# Altium PCB Temp_sense_Project 2.0.PcbDoc (part 3 of 4)
Units mm, origin at the board's own origin, x right, y up, seen from the top; angles counter-clockwise.
Board outline 238.51 x 89.79 mm, 4 copper layers (Top Layer, Layer 1, Layer 2, Bottom Layer), stack 0.603 mm thick; 186 components, 160 nets, 969 pads, 267 vias.
Unrouted connection lines stored in the file: 10.
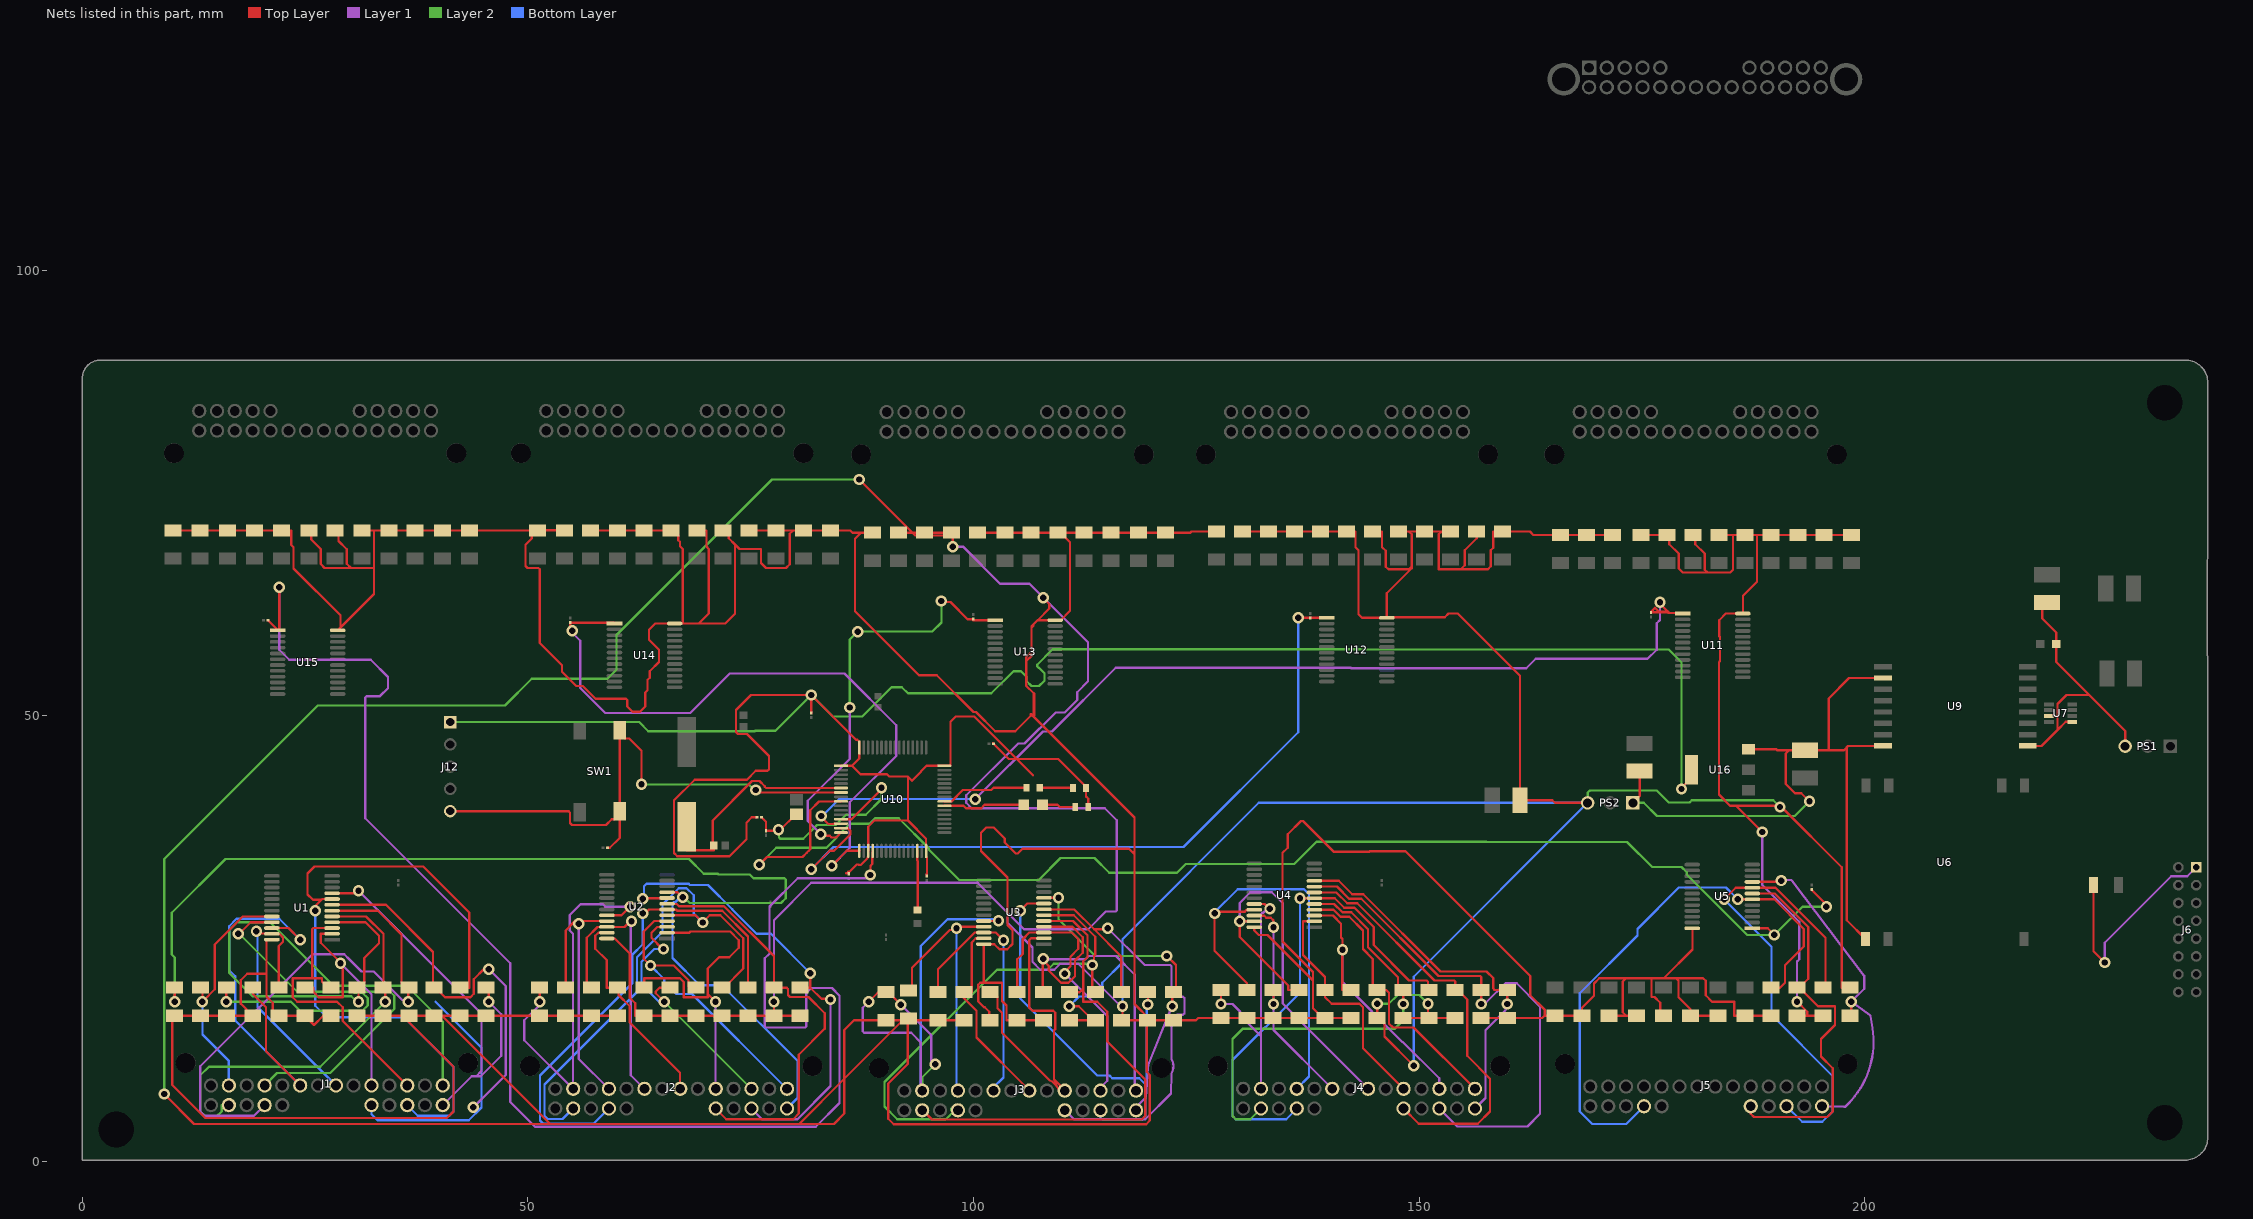
[diagram p4: the nets of this part, all layers, seen from the top]

## Via types
v1: diameter 1.27, hole 0.711, Top Layer to Bottom Layer, 261 vias
v2: diameter 0.711, hole 0.711, Top Layer to Bottom Layer, 6 vias

## Nets (pads, with @x,y where several pads share a name; then routed paths per layer and width w, separated by ;. In a path a pad name is that pad's centre, name@x,y a point inside that pad or via, vN(x,y) a via of type N, cw(c..) or ccw(c..) an arc to the next point about the centre after c; other vN are vias at no path point) (continued)
NetC7_1: C7.1 U5.1 U10.9 | length 153.9
  Top Layer w0.254: v1(75.946,33.274) 76.827,34.155 80.811,34.155 81.274,34.618 81.497,34.841 81.661,35.005 81.661,39.395 82.65,40.384 U10.9@85.126,40.384 ; U5.1@187.398,26.143 189.122,26.143 v1(189.865,25.4) ; C7.1@194.056,30.479 194.056,30.434 195.707,28.783 v1(195.707,28.575)
  Layer 2 w0.254: v1(75.946,33.274) 77.851,35.179 83.485,35.179 84.582,36.276 84.582,36.347 86.106,37.871 88.33,37.871 88.94,38.481 91.607,38.481 95.003,35.085 95.003,34.969 98.4,31.572 107.304,31.572 109.768,34.036 113.578,34.036 115.229,32.385 122.836,32.385 123.817,33.367 135.983,33.367 138.481,35.865 157.524,35.865 157.549,35.839 173.337,35.839 176.156,33.02 179.44,33.02 180.035,32.425 180.035,32.182 186.817,25.4 v1(189.865,25.4) 193.04,28.575 v1(195.707,28.575)
NetC8_1: C8.1 U10.14 U11.1 | length 116.9
  Top Layer w0.254: v1(82.911,38.745) 82.911,38.628 83.693,37.846 84.328,37.846 84.357,37.875 84.946,37.875 U10.14@84.963,37.892 ; v1(177.038,62.738) 177.038,62.56 177.944,61.654 176.924,61.654 176.475,62.103 176.018,61.645 176.018,61.6 C8.1@176.022,61.595 177.885,61.595 177.952,61.528 179.511,61.528 U11.1@179.578,61.461
  Layer 1 w0.254: v1(100.203,40.64) 107.796,48.233 108.809,48.233 115.947,55.372 142.327,55.372 142.378,55.321 162.012,55.321 163.079,56.388 175.641,56.388 176.657,57.404 176.657,60.365 177.038,60.746 v1(177.038,62.738)
  Bottom Layer w0.254: v1(82.911,38.745) 83.028,38.745 84.923,40.64 v1(100.203,40.64)
NetC9_1: C9.1 U10.15 U12.1 | length 84.7
  Top Layer w0.254: v1(81.788,32.766) 83.856,34.834 84.33,34.834 86.203,36.707 86.203,37.061 85.889,37.375 85.135,37.375 U10.15@85.126,37.384 ; v1(136.449,60.979) U12.1@139.627,60.979
  Bottom Layer w0.254: v1(81.788,32.766) 84.277,35.255 123.571,35.255 136.449,48.133 v1(136.449,60.979)
NetC10_1: C10.1 U10.16 U13.1 | length 47.4
  Top Layer w0.254: v1(82.864,36.713) 83.059,36.519 83.859,36.519 84.056,36.322 84.582,36.322 84.963,36.703 84.963,36.863 U10.16@84.967,36.867 ; v1(96.393,62.865) 96.512,62.746 97.409,62.746 99.323,60.832 99.945,60.832 99.945,60.787 99.949,60.782 99.949,60.725 U13.1@102.416,60.725
  Layer 1 w0.254: v1(82.864,36.713) 81.407,38.171 81.407,40.45 86.106,45.148 v1(86.106,50.927)
  Layer 2 w0.254: v1(86.106,50.927) 86.106,58.547 v1(86.995,59.436) 95.377,59.436 96.393,60.452 v1(96.393,62.865)
NetC11_1: C11.1 U10.17 U14.1 | length 76.2
  Top Layer w0.254: v1(54.977,59.526) 54.977,59.801 54.733,60.045 54.733,60.402 54.737,60.406 54.737,60.428 58.805,60.428 58.809,60.424 59.623,60.424 U14.1@59.703,60.344 ; v1(84.074,33.147) 85.761,34.834 U10.17@87.176,34.834
  Layer 1 w0.254: v1(54.977,59.526) 54.977,59.3 55.857,58.42 55.857,53.109 58.667,50.299 68.206,50.299 72.644,54.737 85.511,54.737 91.313,48.935 91.313,45.486 86.106,40.279 86.106,35.179 v1(84.074,33.147)
NetC12_1: C12.1 U10.20 U15.1 | length 176.6
  Top Layer w0.254: C12.1@20.829,60.706 21.844,59.691 21.844,59.636 U15.1@21.898,59.582 22.098,59.582 v1(22.098,64.414) ; v1(88.392,32.131) 88.445,32.184 88.445,33.147 88.646,33.348 88.646,34.019 88.668,34.04 88.668,34.654 U10.20@88.684,34.671
  Layer 1 w0.254: v1(22.098,64.414) 22.098,57.404 23.216,56.286 32.356,56.286 34.29,54.352 34.29,53.09 33.397,52.197 31.899,52.197 31.75,52.048 31.75,38.481 48.006,22.225 48.006,6.655 50.8,3.861 82.296,3.861 84.963,6.528 84.963,18.582 84.114,19.431 81.788,19.431 81.229,18.872 81.229,15.16 81.08,15.011 76.73,15.011 76.581,15.16 76.581,22.777 77.089,23.285 77.089,28.575 80.264,31.75 88.011,31.75 v1(88.392,32.131)
NetC13_2: C13.2 U10.6 Y1.1 | length 29.3
  Top Layer w0.254: Y1.1@67.818,37.541 Y1.1@67.818,35.826 ; C13.2@70.851,35.433 70.851,34.9 67.818,34.9 Y1.1@67.818,35.826 ; U10.6@85.126,41.884 76.73,41.884 76.581,42.033 76.581,42.077 75.986,42.672 75.144,42.672 70.724,38.252 70.724,35.052 70.575,34.903 68.741,34.903 Y1.1@67.818,35.826
NetC14_1: C14.1 J12.5 SW1.1 SW1.2 U10.7 | length 64.3
  Top Layer w0.254: J12.5@41.275,39.283 47.585,39.283 47.603,39.265 54.559,39.265 54.708,39.116 54.708,37.957 54.931,37.734 58.758,37.734 59.399,38.375 59.716,38.375 60.289,38.948 SW1.2@60.289,39.265 ; C14.1@58.928,35.179 58.978,35.179 59.182,35.179 60.289,36.286 SW1.2@60.289,39.265 ; SW1.1@60.289,48.365 SW1.1@60.289,48.015 ; v1(62.738,42.291) 62.738,46.08 61.376,47.442 60.862,47.442 SW1.1@60.289,48.015 ; v1(75.565,41.656) 75.84,41.656 76.12,41.376 U10.7@84.518,41.376 ; SW1.2@60.289,39.265 SW1.1@60.289,48.015
  Layer 2 w0.254: v1(62.738,42.291) 74.763,42.291 75.398,41.656 v1(75.565,41.656)
NetC15_2: C15.2 C16.1 FB1.2 U10.13 | length 27.6
  Top Layer w0.254: FB1.2@76.201,38.608 76.708,38.101 C16.1@76.708,37.084 77.978,37.084 v1(78.105,37.211) 78.322,37.211 80.062,38.951 C15.2@80.137,38.951 ; U10.13@85.126,38.384 86.307,38.384 89.662,41.739 v1(89.662,41.9)
  Layer 2 w0.254: v1(78.105,37.211) 78.167,37.149 78.167,36.344 78.315,36.195 80.899,36.195 82.433,37.729 84.527,37.729 85.685,38.887 87.909,38.887 89.662,40.64 v1(89.662,41.9)
NetC17_1: C17.1 U10.30 | length 6.7
  Top Layer w0.254: U10.30@93.676,34.834 93.676,33.757 93.726,33.707 C17.1@93.726,28.182
NetC18_1: C18.1 C21.1 C25.1 C26.1 FB1.1 J12.1 R122.1 R123.1 U10.1 U10.19 U10.32 U10.48 U10.64 U16.4 | length 296.2
  Top Layer w0.254: FB1.1@75.692,38.608 75.642,38.604 75.116,38.604 74.513,38 74.513,36.127 72.607,34.221 66.749,34.221 66.387,34.583 66.387,40.499 68.711,42.823 74.577,42.823 75.569,43.815 76.884,43.815 77.033,43.964 77.033,45.49 74.575,47.947 73.56,47.947 73.337,48.17 73.337,50.636 75.025,52.324 v1(81.788,52.324) ; C26.1@81.788,50.292 v1(81.788,52.324) ; U10.1@85.126,44.384 86.36,44.384 ; 85.725,32.308 85.775,32.308 85.979,32.512 86.106,32.512 86.89,33.296 87.1,33.296 87.141,33.255 87.351,33.255 88.103,34.007 88.103,34.123 88.155,34.175 88.155,34.813 U10.19@88.176,34.834 88.176,37.543 88.868,38.235 92.642,38.235 ; C21.1@94.742,32.131 94.742,32.177 94.746,32.181 94.746,32.265 94.768,32.287 94.768,34.079 94.676,34.172 U10.32@94.676,34.834 94.676,36.2 92.642,38.235 ; C25.1@102.176,46.922 103.962,45.136 104.851,45.136 ; 106.68,43.307 104.851,45.136 ; R122.1@112.866,39.751 112.866,40.691 112.612,40.945 R123.1@112.612,41.91 112.612,42.037 109.513,45.136 104.851,45.136 ; v1(179.451,41.783) 179.451,41.924 180.569,43.042 U16.4@180.569,43.942 ; v1(81.788,52.324) 86.817,47.295 86.953,47.295 87.176,47.072 U10.64@87.176,46.434 87.176,45.2 86.36,44.384 ; 86.36,44.384 87.32,43.424 90.293,43.424 90.537,43.18 92.623,43.18 92.642,43.161 ; 92.642,38.235 92.642,43.161 ; 92.642,43.161 93.091,42.712 94.094,43.715 94.094,43.762 94.716,44.384 U10.48@96.726,44.384 97.257,44.384 97.409,44.536 97.409,49.316 98.004,49.911 100.076,49.911 104.851,45.136
  Layer 2 w0.254: J12.1@41.275,49.283 62.486,49.283 63.502,48.267 75.445,48.267 75.489,48.311 77.775,48.311 v1(81.788,52.324) 84.201,49.911 87.503,49.911 90.798,53.206 91.955,53.206 92.654,52.507 101.997,52.507 104.481,54.991 105.323,54.991 105.918,54.396 105.918,53.935 106.513,53.34 107.355,53.34 107.95,53.935 107.95,54.777 107.355,55.372 107.29,55.372 107.141,55.521 107.141,55.731 108.864,57.455 143.434,57.455 143.455,57.434 178.024,57.434 179.451,56.007 v1(179.451,41.783)
NetC19_2: C19.2 C22.2 PS2.1 U6.9 U9.10 U9.16 U16.3 | length 83.2
  Top Layer w0.254: PS2.1@173.99,40.223 174.752,40.985 C19.2@174.752,43.789 ; U16.3@186.969,46.242 190.068,46.242 190.183,46.127 191.516,46.127 ; v1(193.802,40.386) 192.889,41.299 192.18,41.299 191.135,42.344 191.135,45.746 191.516,46.127 ; U6.9@200.088,24.943 197.993,27.038 197.993,46.482 198.12,46.609 198.17,46.609 ; U9.16@202.057,46.609 198.17,46.609 ; U9.10@202.057,54.229 198.247,54.229 195.957,51.939 195.957,46.127 ; 191.516,46.127 C22.2@193.294,46.127 195.957,46.127 ; 195.957,46.127 197.688,46.127 198.018,46.457 198.17,46.609
  Layer 2 w0.254: PS2.1@173.99,40.223 175.22,40.223 176.708,38.735 192.151,38.735 v1(193.802,40.386)
NetC20_1: C20.1 PS2.3 R1.1 R2.1 R3.1 R4.1 R5.1 R6.1 R7.1 R8.1 R9.1 R10.1 R11.1 R12.1 R13.1 R14.1 R15.1 R16.1 R17.1 R18.1 R19.1 R20.1 R21.1 R22.1 R23.1 R24.1 R25.1 R26.1 R27.1 R28.1 R29.1 R30.1 R31.1 R32.1 R33.1 R34.1 R35.1 R36.1 R37.1 R38.1 R39.1 R40.1 R41.1 R42.1 R43.1 R44.1 R45.1 R46.1 R47.1 R48.1 R49.1 R50.1 R51.1 R52.1 R53.1 R54.1 R55.1 R56.1 R57.1 R58.1 R59.1 R60.1 R61.1 R62.1 R63.1 R64.1 R65.1 R66.1 R67.1 R68.1 R69.1 R70.1 R71.1 R72.1 R73.1 R74.1 R75.1 R76.1 R77.1 R78.1 R79.1 R80.1 R81.1 R82.1 R83.1 R84.1 R85.1 R86.1 R87.1 R88.1 R89.1 R90.1 R91.1 R92.1 R93.1 R94.1 R95.1 R96.1 R97.1 R98.1 R99.1 R100.1 R101.1 R102.1 R103.1 R104.1 R105.1 R106.1 R107.1 R108.1 R109.1 R110.1 R111.1 R112.1 R113.1 R114.1 R115.1 R116.1 R117.1 R118.1 R119.1 R120.1 U1.24 U2.24 U3.24 U4.24 U5.24 U11.24 U12.24 U13.24 U14.24 U15.24 | length 1618.7
  Top Layer w0.254: v1(9.169,7.544) 12.522,4.191 52.502,4.191 ; R109.1@10.16,70.79 R110.1@13.208,70.79 R111.1@16.256,70.79 R112.1@19.304,70.79 R113.1@22.352,70.79 23.444,70.79 23.444,69.164 23.698,68.91 23.698,66.523 28.956,61.265 28.956,59.887 ; U1.24@21.263,24.873 20.65,24.873 20.65,21.04 ; R114.1@25.4,70.79 25.679,70.79 25.679,69.762 26.734,68.707 26.734,67.017 27.178,66.573 30.138,66.573 ; R7.1@27.876,16.332 27.014,16.332 25.984,15.302 R8.1@24.955,16.332 R9.1@22.034,16.332 21.361,16.332 21.361,17.78 20.65,18.491 20.65,21.04 ; R115.1@28.321,70.79 28.727,70.79 28.727,69.596 29.655,68.668 29.655,67.056 30.138,66.573 ; U15.24@28.648,59.582 28.651,59.582 28.956,59.887 ; R6.1@30.797,16.332 R5.1@33.718,16.332 R4.1@35.916,16.332 ; R116.1@31.369,70.79 32.715,70.79 ; R98.1@54.102,70.79 53.619,70.79 53.619,70.815 51.079,70.815 R97.1@51.054,70.79 R97.1@50.96,70.79 ; R99.1@57.023,70.79 R100.1@60.071,70.79 R101.1@62.992,70.79 R102.1@66.04,70.79 66.315,70.79 66.866,70.24 66.866,69.699 67.056,69.509 67.056,69.025 67.374,68.707 67.374,60.357 67.361,60.344 ; U2.24@58.855,25 59.734,25 61.417,23.317 61.417,18.339 62.027,17.729 62.027,16.332 R20.1@62.992,16.332 R19.1@65.913,16.332 R18.1@68.834,16.332 R17.1@71.755,16.332 R16.1@74.676,16.332 R15.1@77.597,16.332 ; R21.1@60.071,16.332 R22.1@57.15,16.332 R23.1@54.229,16.332 R24.1@51.308,16.332 R1.1@45.275,16.332 R2.1@42.354,16.332 R3.1@40.361,16.332 ; R103.1@68.961,70.79 70.028,70.79 70.028,68.974 70.295,68.707 70.295,61.468 69.171,60.344 ; R104.1@71.882,70.79 72.542,70.79 72.542,69.901 73.228,69.215 ; R105.1@74.803,70.79 R106.1@77.851,70.79 79.756,70.79 ; v1(77.597,17.907) R15.1@77.597,16.332 ; R14.1@80.518,16.332 R15.1@77.597,16.332 ; v1(87.173,76.505) 93.141,70.536 ; R85.1@88.646,70.536 87.376,70.536 ; R86.1@91.567,70.536 93.141,70.536 ; R87.1@94.615,70.536 95.961,70.536 ; R87.1@94.615,70.536 R87.1@94.488,70.536 93.141,70.536 ; 95.961,70.536 R88.1@97.028,70.536 ; v1(97.663,68.952) 97.663,70.409 R88.1@97.536,70.536 R88.1@97.028,70.536 ; R33.1@98.933,15.824 R34.1@96.012,15.824 93.091,15.824 93.091,16.002 R35.1@92.723,16.002 92.24,16.002 R35.1@92.062,15.824 ; R89.1@100.457,70.536 R90.1@103.505,70.536 R91.1@106.426,70.536 R92.1@109.474,70.536 R92.1@109.749,70.536 ; U3.24@101.143,24.362 101.143,20.033 ; U3.24@101.146,24.365 102.337,24.365 102.902,23.8 103.784,23.8 104.369,24.384 104.369,25.959 103.81,26.518 103.81,31.846 100.838,34.818 100.838,36.87 101.433,37.465 102.275,37.465 103.509,36.231 103.509,35.778 104.742,34.544 104.953,34.544 105.486,35.077 117.45,35.077 118.059,34.468 ; R32.1@101.854,15.824 101.758,15.92 101.758,16.772 101.258,17.272 101.18,17.272 100.52,17.933 100.52,19.81 100.743,20.033 101.143,20.033 ; R30.1@107.823,15.824 R31.1@104.902,15.824 103.696,15.824 103.696,17.484 103.188,17.992 103.188,20.015 103.181,20.033 101.143,20.033 ; v1(107.823,63.246) 107.823,63.181 108.509,62.495 108.509,62.027 107.207,60.725 ; R29.1@110.744,15.824 R28.1@113.39,15.824 ; v1(110.744,17.408) 111.805,17.408 R28.1@113.39,15.824 ; R28.1@113.665,15.824 R28.1@113.39,15.824 ; R27.1@116.586,15.824 R27.1@116.713,15.824 ; v1(116.713,17.399) R27.1@116.713,15.824 ; R73.1@127.254,70.663 124.46,70.663 124.333,70.536 R96.1@121.539,70.536 R95.1@118.491,70.536 R94.1@115.443,70.536 R93.1@112.395,70.536 R92.1@109.749,70.536 ; R74.1@130.175,70.663 R75.1@133.096,70.663 R76.1@136.017,70.663 R77.1@138.938,70.663 R78.1@141.859,70.663 142.875,70.663 142.875,68.898 143.193,68.58 143.193,61.372 143.586,60.979 U12.24@146.355,60.979 ; U4.24@131.499,26.27 131.499,25.908 132.007,25.4 132.994,25.4 138.1,20.295 ; R43.1@142.367,16.078 R44.1@139.446,16.078 R44.1@139.192,16.078 ; R79.1@144.78,70.663 145.847,70.663 145.847,68.91 146.253,68.504 146.253,66.726 146.558,66.421 148.844,66.421 149.174,66.751 ; v1(145.288,17.662) R42.1@145.288,16.078 145.563,16.078 146.114,15.527 146.114,14.007 v1(149.403,10.719) ; R80.1@147.701,70.663 148.869,70.663 ; R41.1@148.209,16.078 R40.1@151.13,16.078 R40.1@151.554,16.078 ; v1(151.003,17.662) 151.003,16.628 R40.1@151.554,16.078 ; R82.1@153.543,70.663 152.502,70.663 ; R39.1@154.051,16.078 R40.1@151.554,16.078 ; R83.1@156.464,70.663 156.464,69.905 155.13,68.571 155.13,66.89 154.686,66.446 ; R38.1@156.972,16.078 R37.1@159.893,16.078 163.831,16.078 164.085,16.332 ; PS2.3@168.91,40.223 165.238,40.223 164.948,40.513 C20.1@161.316,40.513 161.316,54.497 154.345,61.468 153.291,61.468 152.884,61.062 146.99,61.062 146.99,60.979 U12.24@146.377,60.979 U12.24@146.355,60.979 ; R58.1@171.323,16.332 173.228,16.332 ; R63.1@171.704,70.282 R62.1@168.783,70.282 R61.1@165.862,70.282 162.814,70.282 162.433,70.663 R84.1@159.385,70.663 158.318,70.663 158.318,68.847 158.051,68.58 158.051,66.763 157.734,66.446 154.686,66.446 ; R57.1@174.371,16.332 173.228,16.332 ; R64.1@174.879,70.282 R65.1@177.8,70.282 178.079,70.282 178.079,69.254 179.134,68.199 179.134,66.509 179.578,66.065 182.372,66.065 ; R56.1@177.419,16.332 177.063,16.332 177.063,17.78 176.42,18.424 176.085,18.424 176.085,20.549 ; U5.24@180.648,26.143 180.67,26.143 180.67,23.774 177.444,20.549 ; R66.1@180.721,70.282 181,70.282 181,69.245 182.055,68.19 182.055,66.382 182.372,66.065 ; R54.1@183.515,16.332 R55.1@180.467,16.332 180.467,17.069 179.121,18.415 179.121,20.244 178.816,20.549 ; R67.1@183.642,70.282 185.217,70.282 ; v1(188.519,36.957) 185.598,39.878 ; R52.1@189.484,16.332 R53.1@186.563,16.332 185.369,16.332 185.369,17.907 182.88,17.907 182.169,18.618 182.169,20.244 181.864,20.549 178.816,20.549 ; v1@190.355,39.878 185.598,39.878 ; v1@190.456,39.795 190.355,39.896 185.58,39.896 ; v1(190.5,39.751) 190.667,39.751 197.434,32.984 197.434,19.482 R49.1@198.374,19.482 ; R51.1@192.405,16.332 193.549,16.332 ; v1(192.405,17.916) 193.549,16.772 193.549,16.332 ; R50.1@195.326,16.332 193.549,16.332 ; R72.1@198.501,70.282 R71.1@195.453,70.282 R70.1@192.532,70.282 R69.1@189.484,70.282 187.909,70.282 ; 20.65,21.04 18.501,21.04 17.779,20.318 17.779,19.049 17.755,19.025 17.755,17.69 R10.1@19.113,16.332 R11.1@16.192,16.332 R12.1@13.271,16.332 R13.1@10.35,16.332 10.084,16.332 10.084,8.56 13.792,4.851 40.894,4.851 41.631,5.588 41.631,10.617 R4.1@35.916,16.332 ; 28.956,59.887 32.715,63.646 32.715,66.573 ; 30.138,66.573 32.715,66.573 ; 32.715,66.573 32.715,70.79 ; 32.715,70.79 R117.1@34.417,70.79 R118.1@37.338,70.79 R119.1@40.386,70.79 R120.1@43.434,70.79 R97.1@50.96,70.79 ; R4.1@35.916,16.332 R4.1@36.639,16.332 R3.1@39.433,16.332 R3.1@40.361,16.332 ; R3.1@40.361,16.332 52.502,4.191 ; R97.1@50.96,70.79 50.41,70.24 50.41,69.881 49.72,69.191 49.72,66.804 49.943,66.581 51.159,66.581 51.308,66.432 51.308,58.166 53.825,55.649 53.825,54.928 55.417,53.336 56.138,53.336 57.582,51.892 60.989,51.892 61.138,51.744 61.138,51.04 61.733,50.444 62.575,50.444 63.17,51.04 63.17,52.6 63.424,52.854 63.424,54.026 63.652,54.254 63.652,54.991 64.694,56.032 64.694,57.404 63.576,58.522 63.576,59.632 64.288,60.344 U14.24@66.454,60.344 67.361,60.344 ; 52.502,4.191 80.429,4.191 ; 67.361,60.344 69.171,60.344 ; 69.171,60.344 72.136,60.344 73.228,61.436 73.228,69.215 ; 73.228,69.215 73.745,68.698 76.137,68.698 76.137,67.144 76.708,66.573 78.954,66.573 79.375,66.994 79.375,70.409 79.756,70.79 ; 79.756,70.79 R107.1@80.899,70.79 R108.1@83.947,70.79 86.157,70.79 86.411,70.536 87.376,70.536 ; 80.429,4.191 85.496,9.258 ; 80.429,4.191 84.328,4.191 85.496,5.359 85.496,9.258 ; 85.496,9.258 R35.1@92.062,15.824 ; 85.496,9.258 85.496,14.732 86.588,15.824 R36.1@90.17,15.824 R35.1@92.062,15.824 ; 87.376,70.536 86.69,69.851 86.69,61.733 93.885,54.539 95.875,54.539 99.995,50.419 100.286,50.419 102.445,48.26 104.688,48.26 106.426,49.998 106.426,50.165 106.453,50.192 118.059,38.585 118.059,34.468 ; R35.1@92.062,15.824 92.608,15.824 92.608,10.922 90.424,8.738 90.424,4.775 91.034,4.166 119.38,4.166 119.786,4.572 119.786,9.692 119.431,10.047 R26.1@119.431,15.824 ; 93.141,70.536 93.459,70.218 96.71,70.218 R88.1@97.028,70.536 ; 105.918,53.347 105.918,56.109 ; 105.918,53.347 105.918,53.34 106.753,52.505 ; 105.918,53.347 106.753,52.512 106.753,52.505 ; 105.918,56.109 105.918,56.564 106.502,57.148 ; 105.918,56.109 106.502,56.693 106.502,57.148 ; 106.502,57.148 106.502,59.857 ; 106.502,59.857 106.705,60.06 106.705,60.223 ; 106.502,59.857 106.502,60.02 106.705,60.223 ; 106.705,60.223 107.207,60.725 ; 106.705,60.223 106.705,60.242 107.188,60.725 107.207,60.725 ; 106.753,52.505 106.753,50.109 106.807,50.055 106.807,52.451 106.753,52.505 ; 107.207,60.725 U13.24@109.166,60.725 109.779,60.725 110.82,61.766 110.82,69.466 R92.1@109.749,70.536 ; R27.1@116.713,15.824 R26.1@119.431,15.824 ; 118.059,34.468 118.059,17.652 R26.1@119.888,15.824 ; R26.1@119.431,15.824 R26.1@119.507,15.824 R26.1@119.888,15.824 ; R26.1@119.888,15.824 R25.1@122.428,15.824 124.968,15.824 125.222,16.078 R48.1@127.762,16.078 R47.1@130.683,16.078 R46.1@133.604,16.078 R45.1@136.525,16.078 R44.1@139.192,16.078 ; 138.1,20.295 138.1,21.234 134.671,24.663 134.671,34.609 135.255,35.194 135.255,36.692 136.751,38.188 136.962,38.188 140.403,34.747 144.407,34.747 144.458,34.798 148.463,34.798 162.484,20.777 162.484,18.618 164.085,17.017 164.085,16.332 ; 138.1,20.295 138.1,17.17 R44.1@139.192,16.078 ; U12.24@146.355,60.979 146.355,63.729 149.174,66.548 149.174,66.751 ; 148.869,70.663 R81.1@150.622,70.663 152.502,70.663 ; 148.869,70.663 149.174,70.358 149.174,66.751 ; 152.502,70.663 152.197,70.358 152.197,66.446 154.686,66.446 ; 164.085,16.332 R60.1@165.227,16.332 R59.1@168.275,16.332 168.275,17.221 169.621,18.567 169.621,19.95 170.212,20.541 171.716,20.541 171.724,20.549 173.228,20.549 ; 173.228,16.332 172.847,16.713 172.847,20.168 173.228,20.549 ; 173.228,20.549 176.085,20.549 ; 176.085,20.549 177.444,20.549 ; 177.444,20.549 178.816,20.549 ; 182.372,66.065 184.912,66.065 185.217,66.37 185.217,70.282 ; 185.217,70.282 R68.1@186.563,70.282 187.909,70.282 ; 185.58,39.896 184.894,39.896 183.642,41.148 183.642,56.007 183.769,56.134 183.769,58.826 183.667,58.928 183.667,60.724 184.404,61.461 U11.24@186.328,61.461 186.334,61.461 186.334,63.449 187.909,65.024 187.909,70.282 ; 185.58,39.896 185.598,39.878
  Layer 1 w0.254: v1(77.597,17.907) 77.597,27.051 81.788,31.242 100.457,31.242 103.81,27.889 ; v1(97.663,68.952) 98.815,68.952 ; v1(107.823,63.246) 106.274,64.795 102.972,64.795 98.815,68.952 ; v1(116.713,17.399) 116.521,17.399 111.746,22.174 109.739,22.174 109.068,21.504 107.496,21.504 106.604,22.396 106.604,23.978 103.81,26.772 103.81,27.889 ; v1(188.519,36.957) 188.519,31.013 192.659,26.873 192.659,22.659 192.405,22.405 v1(192.405,17.916) ; 98.815,68.952 98.866,68.952 102.998,64.821 106.274,64.821 112.852,58.243 112.852,53.857 111.628,52.633 111.628,51.771 110.228,50.371 109.216,50.371 105.73,46.885 105.012,46.885 99.187,41.061 99.187,40.219 99.782,39.624 114.721,39.624 116.067,38.278 116.067,28.165 115.918,28.016 114.844,28.016 112.863,26.035 105.664,26.035 103.81,27.889
  Layer 2 w0.254: v1(9.169,7.544) 9.169,33.909 26.416,51.156 47.422,51.156 50.419,54.153 58.928,54.153 59.944,55.169 59.944,59.055 77.394,76.505 v1(87.173,76.505) ; v1(145.288,17.662) 146.597,17.662 147.596,18.66 150.005,18.66 v1(151.003,17.662) ; PS2.3@168.91,40.223 168.91,41.351 169.164,41.605 176.657,41.605 178.003,40.259 180.336,40.259 180.59,40.513 189.738,40.513 v1(190.5,39.751)
  Bottom Layer w0.254: v1(110.744,17.408) 111.837,18.501 113.552,18.501 114.451,19.4 114.451,20.039 116.713,22.301 ; v1(116.713,17.399) 116.713,22.301 ; v1(149.403,10.719) 149.403,20.716 PS2.3@168.91,40.223 132.019,40.223 116.713,24.917 116.713,22.301
NetC24_1: C24.1 PS1.3 R124.2 U7.3 U7.5 U9.1 | length 36
  Top Layer w0.254: U9.1@218.307,46.609 219.821,46.609 219.847,46.609 221.627,48.389 221.627,49.967 ; C24.1@220.319,62.712 C24.1@220.472,62.712 ; C24.1@220.319,62.738 220.319,62.23 219.938,62.23 219.938,60.896 221.499,59.334 R124.2@221.499,58.039 221.499,56.021 225.196,52.324 ; U7.3@220.696,49.967 221.627,49.967 ; U7.5@223.296,49.317 222.555,49.317 221.645,48.407 221.645,49.967 221.627,49.967 ; PS1.3@229.235,46.573 229.235,48.285 225.196,52.324 ; 221.627,49.967 221.64,51.308 222.656,52.324 225.196,52.324
NetD1_1: D1.1 U10.39 | length 9.2
  Top Layer w0.254: U10.39@96.726,39.884 98.881,39.884 99.141,39.624 100.857,39.624 101.238,40.005 D1.1@105.63,40.005
NetD1_2: D1.2 R122.2 | length 3.8
  Top Layer w0.254: D1.2@107.73,40.005 109.423,40.005 109.677,39.751 R122.2@111.416,39.751
NetD2_1: D2.1 U10.40 | length 9.8
  Top Layer w0.254: U10.40@96.726,40.384 97.528,40.384 98.8,41.656 101.981,41.656 102.235,41.91 D2.1@105.93,41.91
NetD2_2: D2.2 R123.2 | length 3.7
  Top Layer w0.254: D2.2@107.43,41.91 R123.2@111.162,41.91
NetF1_1: F1.1 J6.1 | length 25.2
  Top Layer w0.254: F1.1@225.676,30.988 225.676,23.576 v1(226.949,22.303)
  Layer 1 w0.254: v1(226.949,22.303) 226.949,24.511 234.417,31.979 236.196,31.979 J6.1@237.204,32.987
NetJ1_1: J1.1 R1.2 U1.9 | length 47.1
  Top Layer w0.254: U1.9@28.013,30.073 30.433,30.073 30.713,30.353 v1(30.988,30.353) ; R1.2@45.275,19.482 45.593,19.164 v1(45.593,17.907)
  Layer 1 w0.254: v1(30.988,30.353) 44.78,16.561 44.78,10.135 44.196,9.55 ; J1.1@40.437,6.299 43.688,9.55 44.196,9.55 ; v1(45.593,17.907) 46.99,16.51 46.99,11.836 44.704,9.55 44.196,9.55
NetJ1_3: J1.3 R2.2 U1.8 | length 76.9
  Top Layer w0.254: v1(26.137,28.118) 26.137,28.636 26.838,29.337 ; U1.8@28.013,29.423 26.924,29.423 26.838,29.337 ; R2.2@42.354,19.482 43.409,19.482 43.409,27.915 38.252,33.071 26.035,33.071 25.268,32.304 25.268,29.932 25.863,29.337 26.838,29.337
  Bottom Layer w0.254: v1(26.137,28.118) 26.137,17.45 27.432,16.154 36.068,16.154 41.631,10.592 41.631,5.588 41.161,5.118 37.63,5.118 J1.3@36.449,6.299
NetJ1_5: J1.5 R3.2 U1.7 | length 74
  Top Layer w0.254: U1.7@28.013,28.773 34.052,28.773 39.345,23.481 R3.2@39.345,19.762 ; R3.2@39.433,19.482 39.345,19.482 R3.2@39.345,19.762 ; v1(45.593,21.565) 45.06,21.565 43.917,20.422 43.917,18.796 43.536,18.415 40.691,18.415 R3.2@39.345,19.762
  Layer 1 w0.254: v1(43.866,6.045) 47.498,9.677 47.498,19.66 v1(45.593,21.565)
  Bottom Layer w0.254: J1.5@32.436,6.299 32.436,5.283 33.109,4.61 43.345,4.61 44.78,6.045 44.78,6.96 ; 39.624,17.898 44.78,12.742 44.78,6.96 ; v1(43.866,6.045) 44.78,6.96
NetJ1_7: J1.7 R4.2 U1.6 | length 60.8
  Top Layer w0.254: U1.6@28.013,28.123 33.142,28.123 35.813,25.452 35.813,20.033 36.363,19.482 R4.2@36.639,19.482 36.576,19.42 v1(36.576,17.898)
  Layer 1 w0.254: J1.7@20.447,6.299 19.253,5.105 13.716,5.105 13.233,5.588 13.233,10.668 25.806,23.241 29.377,23.241 29.972,22.646 29.972,22.63 31.317,21.284 32.691,21.284 35.882,18.093 36.382,18.093 v1(36.576,17.898)
NetJ1_9: J1.9 R5.2 U1.5 | length 47.2
  Top Layer w0.254: U1.5@28.013,27.473 31.832,27.473 33.782,25.523 33.782,19.547 R5.2@33.718,19.482 33.985,19.482 v1(33.985,17.907)
  Layer 2 w0.254: J1.9@16.434,6.299 15.621,6.299 15.621,5.588 14.986,4.953 13.868,4.953 13.233,5.588 13.233,9.652 14.199,10.617 26.695,10.617 v1(33.985,17.907)
NetJ1_11: J1.11 R6.2 U1.4 | length 71.3
  Top Layer w0.254: U1.4@28.013,26.823 31.764,26.823 33.274,25.313 33.274,24.471 31.623,22.82 31.623,20.033 31.072,19.482 R6.2@30.797,19.482 30.988,19.291 v1(30.988,17.898)
  Layer 2 w0.254: v1(30.988,17.898) 30.788,17.898 30.17,18.517 19.094,18.517 16.475,21.135 16.475,25.948 17.35,26.823 21.042,26.823 28.18,19.685 36.4,19.685 40.437,15.649 J1.11@40.437,8.509
NetJ1_13: J1.13 R7.2 U1.3 | length 32.7
  Top Layer w0.254: R7.2@27.876,19.482 27.534,19.482 26.873,20.143 26.873,20.549 25.781,20.549 ; U1.3@28.013,26.173 25.93,26.173 25.781,26.024 25.781,20.549 ; J1.13@36.449,8.509 29.21,15.748 29.21,17.272 28.575,17.907 24.105,17.907 23.597,18.415 23.597,20.549 25.781,20.549
NetJ1_15: J1.15 R8.2 U1.2 | length 29.5
  Top Layer w0.254: R8.2@24.955,19.482 25.933,19.482 25.933,19.003 26.522,18.415 29.21,18.415 29.21,21.568 29.15,21.628 29.15,22.031 v1(28.956,22.225) ; U1.2@28.013,25.523 26.746,25.523 26.746,24.511 v1@28.994,22.263
  Layer 1 w0.254: v1(28.956,22.225) 32.436,18.745 J1.15@32.436,8.509
NetJ1_17: J1.17 R9.2 U1.23 | length 30.1
  Top Layer w0.254: v1(19.523,25.807) 19.798,25.807 20.051,25.554 21.232,25.554 U1.23@21.263,25.523 21.294,25.492 22.076,25.492 22.107,25.461 22.176,25.461 22.52,25.117 22.52,24.629 22.034,24.143 R9.2@22.034,19.482
  Bottom Layer w0.254: v1(19.523,25.807) 19.634,25.696 19.634,17.323 J1.17@28.448,8.509
NetJ1_19: J1.19 R10.2 U1.22 | length 47.3
  Top Layer w0.254: R10.2@19.113,19.482 19.101,19.482 19.101,18.771 20.599,17.272 20.599,12.344 J1.19@24.435,8.509 ; U1.22@21.263,26.173 23.128,26.173 v1(24.435,24.867)
  Bottom Layer w0.254: J1.19@24.435,8.509 17.145,15.799 17.145,20.757 16.475,21.427 16.475,26.385 17.294,27.203 22.098,27.203 v1(24.435,24.867)
NetJ1_21: J1.21 R11.2 U1.21 | length 65.1
  Top Layer w0.254: v1(16.129,17.898) 16.129,19.42 R11.2@16.192,19.482 ; v1(17.491,25.527) 17.602,25.527 18.898,26.823 U1.21@21.263,26.823
  Layer 2 w0.254: v1(16.129,17.898) 23.398,17.898 24.414,16.882 31.409,16.882 32.004,17.477 32.004,18.319 31.409,18.914 30.567,18.914 30.457,19.025 ; v1(17.491,25.527) 17.602,25.527 24.105,19.025 30.457,19.025 ; J1.21@20.447,8.509 21.844,9.906 27.813,9.906 35.001,17.094 35.001,18.567 34.544,19.025 30.457,19.025
NetJ1_23: J1.23 R12.2 U1.20 | length 27.2
  Top Layer w0.254: R12.2@13.271,19.482 13.462,19.291 v1(13.462,17.898) 13.585,17.776 13.585,18.021 14.858,19.294 14.858,24.33 18,27.473 U1.20@21.263,27.473
  Bottom Layer w0.254: v1(13.462,17.898) 13.462,14.224 16.434,11.252 J1.23@16.434,8.509
NetJ2_1: J2.1 R13.2 U2.9 | length 132.4
  Top Layer w0.254: v1(10.35,17.898) R13.2@10.35,19.482 ; U2.9@65.605,30.2 66.764,30.2 67.332,29.632 v1(67.368,29.632)
  Layer 2 w0.254: v1(10.35,17.898) 10.35,22.873 10.033,23.19 10.033,27.889 16.053,33.909 68.072,33.909 69.723,32.258 71.293,32.258 71.362,32.189 74.876,32.189 75.315,31.75 78.78,31.75 78.929,31.601 78.929,29.508 78.391,28.97 68.143,28.97 67.48,29.632 v1(67.368,29.632)
  Bottom Layer w0.254: v1(67.368,29.632) 67.093,29.632 66.564,29.103 66.397,29.103 66.218,28.923 66.218,22.809 69.266,19.761 71.755,19.761 80.239,11.278 80.239,7.112 J2.1@79.045,5.918
NetJ2_3: J2.3 R14.2 U2.8 | length 53.4
  Top Layer w0.254: v1(62.865,29.464) 62.92,29.519 65.574,29.519 U2.8@65.605,29.55 ; R14.2@80.518,19.482 81.686,19.482 ; v1(81.686,21.108) 81.686,19.482 ; v1(83.947,18.161) 83.871,18.237 82.931,18.237 81.686,19.482
  Layer 1 w0.254: J2.3@75.057,5.918 76.251,4.724 80.239,4.724 83.947,8.433 v1(83.947,18.161)
  Bottom Layer w0.254: v1(62.865,29.464) 63.029,29.628 63.029,30.853 63.332,31.156 67.999,31.156 68.154,31.002 70.195,31.002 72.923,28.273 72.923,28.256 75.652,25.527 77.267,25.527 v1(81.686,21.108)
NetJ2_5: J2.5 R15.2 U2.7 | length 47.8
  Top Layer w0.254: U2.7@65.605,28.9 65.636,28.869 66.694,28.869 66.947,28.616 72.004,28.616 77.597,23.023 R15.2@77.597,19.482 79.035,19.482 79.184,19.334 79.184,18.647 79.407,18.424 81.485,18.424 83.312,16.597 83.312,14.884 80.391,11.963 80.391,5.359 79.756,4.724 72.238,4.724 J2.5@71.044,5.918
NetJ2_7: J2.7 R16.2 U2.6 | length 55.6
  Top Layer w0.254: v1(62.865,27.813) 63.14,27.813 63.577,28.25 U2.6@65.605,28.25 65.636,28.219 66.626,28.219 66.737,28.108 71.794,28.108 74.676,25.226 R16.2@74.676,19.482
  Bottom Layer w0.254: J2.7@59.055,5.918 57.366,4.229 51.689,4.229 51.346,4.572 51.346,9.633 61.722,20.009 61.722,23.202 62.865,24.345 v1(62.865,27.813)
NetJ2_9: J2.9 R17.2 U2.5 | length 58.1
  Top Layer w0.254: U2.5@65.605,27.6 68.793,27.6 v1(69.596,26.797) 70.399,27.6 71.583,27.6 74.168,25.015 74.168,21.62 72.03,19.482 R17.2@71.755,19.482
  Bottom Layer w0.254: J2.9@55.042,5.918 53.861,4.737 52.197,4.737 51.854,5.08 51.854,8.617 62.23,18.993 62.23,22.885 65.1,25.756 65.1,28.821 66.927,30.648 67.789,30.648 68.595,29.842 68.595,27.798 v1(69.596,26.797)
NetJ2_11: J2.11 R18.2 U2.4 | length 34.9
  Top Layer w0.254: U2.4@65.605,26.95 64.161,26.95 62.992,25.781 62.992,22.733 v1(63.754,21.971) 66.352,21.971 68.008,20.315 68.008,19.623 68.148,19.482 R18.2@68.834,19.482
  Bottom Layer w0.254: v1(63.754,21.971) 65.299,20.426 65.299,20.121 66.65,18.771 68.402,18.771 J2.11@79.045,8.128
NetJ2_13: J2.13 R19.2 U2.3 | length 30.5
  Top Layer w0.254: v1(65.202,23.825) 65.1,23.825 63.856,25.07 63.856,25.64 64.516,26.3 U2.3@65.605,26.3 ; v1(65.278,17.907) 64.342,18.843 64.342,19.054 64.77,19.482 R19.2@65.913,19.482
  Layer 2 w0.254: v1(65.278,17.907) J2.13@75.057,8.128
  Bottom Layer w0.254: v1(65.202,23.825) 64.171,23.825 62.738,22.392 62.738,19.863 64.694,17.907 v1(65.278,17.907)
NetJ2_15: J2.15 R20.2 U2.2 | length 38.2
  Top Layer w0.254: R20.2@62.992,19.482 63.043,19.482 63.043,20.549 67.056,20.549 67.488,20.117 67.488,18.415 70.18,18.415 70.18,18.771 ; U2.2@65.605,25.65 68.117,25.65 68.248,25.781 72.684,25.781 73.66,24.805 73.66,23.963 72.585,22.888 71.433,22.888 70.18,21.635 70.18,18.771 ; v1(71.044,17.907) 70.18,18.771
  Layer 1 w0.254: J2.15@71.044,8.128 v1(71.044,17.907)
NetJ2_17: J2.17 R21.2 U2.23 | length 23.3
  Top Layer w0.254: U2.23@58.855,25.65 57.912,25.65 57.556,25.294 57.556,23.851 58.826,22.581 58.826,19.482 R21.2@60.071,19.482 60.147,19.482 60.147,18.669 61.417,17.399 61.417,15.57 67.056,9.931 J2.17@67.056,8.128
NetJ2_19: J2.19 R22.2 U2.22 | length 31.4
  Top Layer w0.254: R22.2@57.15,19.482 56.591,19.482 56.591,25.081 57.81,26.3 U2.22@58.855,26.3 60.82,26.3 61.463,26.943 v1(61.614,26.943)
  Layer 1 w0.254: v1(61.614,26.943) 61.519,26.848 61.519,9.652 J2.19@63.043,8.128
NetJ2_21: J2.21 R23.2 U2.21 | length 31.8
  Top Layer w0.254: R23.2@54.229,19.482 54.229,25.908 55.271,26.95 v1@55.982,26.95 ; v1(55.702,26.67) v1@55.982,26.95 ; U2.21@58.855,26.95 v1@55.982,26.95
  Layer 1 w0.254: v1(55.702,26.67) 55.702,11.481 J2.21@59.055,8.128
NetJ2_23: J2.23 R24.2 U2.20 | length 44.4
  Top Layer w0.254: v1(51.308,17.898) R24.2@51.308,19.482 ; U2.20@58.855,27.6 60.493,27.6 v1(61.468,28.575)
  Layer 1 w0.254: v1(51.308,17.898) 51.114,17.704 51.114,17.332 49.593,15.811 49.593,13.577 55.042,8.128 55.042,25.527 54.686,25.883 54.686,27.635 55.88,28.829 58.41,28.829 58.664,28.575 v1(61.468,28.575)
NetJ3_1: J3.1 R25.2 U3.9 | length 39.2
  Top Layer w0.254: U3.9@107.896,29.565 v1(109.525,29.565) ; v1(121.691,23.038) 122.707,22.022 R25.2@122.707,18.974 ; v1(122.301,17.39) 122.301,18.568 R25.2@122.707,18.974 ; R25.2@122.428,18.974 R25.2@122.707,18.974
  Layer 1 w0.254: J3.1@118.237,5.715 118.085,5.715 118.085,5.918 119.278,7.112 119.395,7.69 ; v1(122.301,17.39) 121.717,16.04 119.692,11.026 ; 119.395,7.69 ccw(c118.237,7.925) 119.416,7.851 ; 119.395,7.69 ccw(c118.237,7.925) 119.416,7.851 ; 119.395,7.69 ccw(c118.237,7.925) 119.416,7.851 ; 119.395,7.69 ccw(c118.237,7.925) 119.416,7.851 ; 119.416,7.851 119.586,10.559 ; 119.586,10.559 cw(c121.082,10.465) 119.692,11.026 ; 119.586,10.559 cw(c121.082,10.465) 119.692,11.026 ; 119.586,10.559 cw(c121.082,10.465) 119.692,11.026 ; 119.586,10.559 cw(c121.082,10.465) 119.692,11.026
  Layer 2 w0.254: v1(109.525,29.565) 109.525,27.167 113.654,23.038 v1(121.691,23.038)
NetJ3_3: J3.3 R26.2 U3.8 | length 51.2
  Top Layer w0.254: v1(105.232,28.118) 106.029,28.915 U3.8@107.896,28.915 ; R26.2@119.507,18.974 119.565,18.917 v1(119.565,17.584)
  Bottom Layer w0.254: v1(105.232,28.118) 105.232,18.253 113.868,9.617 115.256,9.617 115.552,9.322 118.593,9.322 119.278,8.636 ; J3.3@114.249,5.715 114.097,5.715 114.097,5.08 114.452,4.724 118.923,4.724 119.278,5.08 119.278,8.636 ; v1(119.565,17.584) 119.431,17.45 119.431,8.788 119.278,8.636
NetJ3_5: J3.5 R27.2 U3.7 | length 60.9
  Top Layer w0.254: U3.7@107.896,28.265 111.301,28.265 113.531,26.035 ; v1(115.062,26.162) 114.935,26.035 113.531,26.035 ; R27.2@116.586,18.974 116.586,22.98 113.531,26.035
  Layer 1 w0.254: J3.5@110.236,5.715 J3.5@110.236,5.766 ; v1(115.062,26.162) 119.202,22.022 122.076,22.022 122.15,21.947 122.225,21.873 122.225,18.615 122.374,18.466 123.513,18.466 123.662,18.318 123.662,16.583 123.513,16.434 122.83,16.434 122.225,15.83 122.225,11.421 ; J3.5@110.236,5.766 111.277,4.724 119.278,4.724 122.15,7.596 122.225,9.813 122.225,9.915 ; J3.5@110.236,5.766 110.236,5.918 110.084,5.918 J3.5@110.236,5.766 ; 122.225,9.915 ccw(c120.929,10.668) 122.225,11.421 ; 122.225,9.915 ccw(c120.929,10.668) 122.225,11.421 ; 122.225,9.915 ccw(c120.929,10.668) 122.225,11.421 ; 122.225,9.915 ccw(c120.929,10.668) 122.225,11.421
NetJ3_7: J3.7 R28.2 U3.6 | length 56
  Top Layer w0.254: U3.6@107.896,27.615 111.232,27.615 113.665,25.182 113.665,23.165 113.529,23.029 113.529,22.158 v1@113.665,22.022 ; v1(113.335,22.022) v1@113.665,22.022 ; R28.2@113.665,18.974 113.335,19.305 113.335,21.692 v1@113.665,22.022
  Layer 2 w0.254: J3.7@98.247,5.715 J3.7@97.892,5.715 ; v1(113.335,22.022) 113.182,22.174 109.008,22.174 108.338,21.504 102.631,21.504 90.018,8.89 90.018,6.147 91.44,4.724 96.901,4.724 J3.7@97.892,5.715 ; J3.7@97.892,5.715 98.095,5.918 97.511,5.918 97.511,5.715 J3.7@97.892,5.715
NetJ3_9: J3.9 R29.2 U3.5 | length 57.7
  Top Layer w0.254: J3.9@94.234,5.715 94.158,5.791 94.082,5.791 94.082,5.918 95.326,4.674 118.872,4.674 119.278,5.08 119.278,9.169 115.011,13.437 115.011,16.764 113.868,17.907 112.319,17.907 112.319,19.406 ; U3.5@107.896,26.965 111.164,26.965 112.776,25.353 112.776,22.9 112.319,22.443 112.319,19.406 ; R29.2@110.744,18.974 111.888,18.974 112.319,19.406
NetJ3_11: J3.11 R30.2 U3.4 | length 43.2
  Top Layer w0.254: R30.2@107.823,18.974 107.754,19.043 107.754,22.664 v1(107.823,22.733) 107.823,22.534 108.442,21.915 108.442,21.406 109.815,20.033 110.657,20.033 111.379,20.755 111.379,22.515 112.268,23.404 112.268,25.142 111.095,26.315 U3.4@107.896,26.315
  Layer 1 w0.254: v1(107.823,22.733) 107.874,22.682 112.558,22.682 112.914,23.038 115.976,23.038 118.085,20.93 118.085,8.001 118.161,8.001 J3.11@118.237,7.925
NetJ3_13: J3.13 R31.2 U3.3 | length 33.2
  Top Layer w0.254: R31.2@104.902,18.974 104.902,22.658 105.536,23.292 105.536,24.943 106.258,25.665 U3.3@107.896,25.665 111.027,25.665 111.76,24.932 111.76,23.852 110.871,22.963 110.871,21.884 110.236,21.249 v1(110.236,21.049)
  Layer 1 w0.254: v1(110.236,21.049) 110.269,21.049 115.011,16.307 115.011,9.042 114.097,8.128 114.249,8.128 J3.13@114.249,7.925
NetJ3_15: J3.15 R32.2 U3.2 | length 39.1
  Top Layer w0.254: R32.2@101.854,18.974 102.129,18.974 102.68,18.424 102.68,17.167 103.188,16.659 103.188,14.414 108.537,9.065 ; U3.2@107.896,25.015 106.451,25.015 106.236,24.8 106.236,17.265 106.619,16.882 108.934,16.882 109.157,16.659 109.157,14.822 109.023,14.688 109.023,9.188 110.084,8.128 J3.15@110.084,7.925 ; J3.15@110.236,7.925 J3.15@110.084,7.925 ; 108.537,9.065 cw(c108.229,7.925) 109.19,8.612 ; 108.537,9.065 cw(c108.229,7.925) 109.19,8.612 ; 108.537,9.065 cw(c108.229,7.925) 109.19,8.612 ; 108.537,9.065 cw(c108.229,7.925) 109.19,8.612 ; 109.19,8.612 109.576,8.074 109.724,7.925 J3.15@110.084,7.925
NetJ3_17: J3.17 R33.2 U3.23 | length 22.2
  Top Layer w0.254: U3.23@101.146,25.015 100.25,25.015 99.797,24.562 99.797,18.974 R33.2@98.933,18.974 98.797,18.424 100.33,16.891 100.33,13.894 106.096,8.128 106.096,7.925 J3.17@106.248,7.925
NetJ3_19: J3.19 R34.2 U3.22 | length 29.5
  Top Layer w0.254: R34.2@96.012,18.974 96.012,21.55 100.127,25.665 U3.22@101.146,25.665 102.503,25.665 v1(103.353,24.816)
  Bottom Layer w0.254: J3.19@102.235,7.925 102.083,7.925 102.083,8.128 103.353,9.398 v1(103.353,24.816)
NetJ3_21: J3.21 R35.2 U3.21 | length 31.4
  Top Layer w0.254: R35.2@92.723,19.153 R35.2@93.091,19.153 ; R35.2@93.091,18.974 R35.2@93.091,19.153 ; U3.21@101.146,26.315 98.273,26.315 v1(98.095,26.137) 97.922,25.964 97.338,25.964 93.091,21.717 R35.2@93.091,19.153
  Bottom Layer w0.254: v1(98.095,26.137) 98.095,8.128 98.247,8.128 J3.21@98.247,7.925
NetJ3_23: J3.23 R36.2 U3.20 | length 60.1
  Top Layer w0.254: v1(88.24,17.907) 89.256,18.923 90.17,18.923 R36.2@90.17,18.974 90.449,18.974 v1(91.847,17.577) ; U3.20@101.146,26.965 102.784,26.965 v1(102.794,26.975)
  Layer 1 w0.254: v1(88.24,17.907) 87.572,17.239 87.572,14.558 87.721,14.409 93.008,14.409 94.082,13.336 J3.23@94.082,8.128 ; v1(91.847,17.577) 95.25,14.174 95.25,11.328 v1(95.694,10.884)
  Layer 2 w0.254: J3.23@94.234,7.925 94.234,9.423 v1(95.694,10.884)
  Bottom Layer w0.254: J3.23@94.082,8.128 94.082,24.155 97.079,27.153 102.616,27.153 v1(102.794,26.975)
NetJ4_1: J4.1 R37.2 U4.9 | length 42.2
  Top Layer w0.254: U4.9@138.249,31.47 140.996,31.47 142.494,29.972 143.72,29.972 152.389,21.303 157.555,21.303 158.306,20.552 158.306,19.377 158.455,19.228 R37.2@159.893,19.228 v1(159.893,17.644)
  Layer 1 w0.254: J4.1@156.261,5.918 157.455,7.112 157.455,14.707 159.699,16.951 159.699,17.45 v1(159.893,17.644)
NetJ4_3: J4.3 R38.2 U4.8 | length 59.4
  Top Layer w0.254: U4.8@138.249,30.82 140.782,30.82 142.138,29.464 143.51,29.464 152.179,20.795 156.823,20.795 156.972,20.646 R38.2@156.972,19.228 v1(156.972,17.644)
  Layer 1 w0.254: J4.3@152.273,5.918 154.28,3.912 162.154,3.912 163.576,5.334 163.576,17.374 160.96,19.99 159.69,19.99 157.539,17.839 157.166,17.839 v1(156.972,17.644)
NetJ4_5: J4.5 R39.2 U4.7 | length 47.7
  Top Layer w0.254: U4.7@138.249,30.17 140.714,30.17 141.928,28.956 143.054,28.956 151.723,20.287 153.902,20.287 154.051,20.138 R39.2@154.051,19.228 R39.2@154.602,18.678 ; J4.5@148.26,5.918 149.962,4.216 156.591,4.216 157.963,5.588 157.963,9.271 155.397,11.836 155.397,18.158 154.877,18.678 R39.2@154.602,18.678 ; R39.2@154.254,18.75 154.254,18.72 154.297,18.678 R39.2@154.602,18.678
NetJ4_7: J4.7 R40.2 U4.6 | length 55.8
  Top Layer w0.254: v1(136.627,29.515) 136.632,29.52 U4.6@138.249,29.52 140.529,29.52 141.601,28.448 142.748,28.448 144.907,26.289 144.907,24.257 148.877,20.287 150.855,20.287 151.004,20.138 151.004,19.354 R40.2@151.13,19.228
  Bottom Layer w0.254: J4.7@136.271,5.918 135.077,4.724 129.413,4.724 129.057,5.08 129.057,11.354 136.627,18.923 v1(136.627,29.515)
NetJ4_9: J4.9 R41.2 U4.5 | length 51.9
  Top Layer w0.254: U4.5@138.249,28.87 140.461,28.87 141.391,27.94 142.371,27.94 144.272,26.039 144.272,24.003 147.625,20.65 147.625,19.228 R41.2@148.209,19.228 v1(148.209,17.644)
  Layer 2 w0.254: J4.9@132.258,5.918 131.064,4.724 129.413,4.724 129.057,5.08 129.057,13.716 130.226,14.884 147.287,14.884 148.209,15.806 v1(148.209,17.644)
NetJ4_11: J4.11 R42.2 U4.4 | length 31.6
  Top Layer w0.254: U4.4@138.249,28.22 140.392,28.22 141.18,27.432 142.16,27.432 143.695,25.898 143.695,23.818 144.805,22.708 144.805,19.228 R42.2@145.288,19.228 146.304,19.228 146.634,18.898 146.634,15.443 147.066,15.011 149.377,15.011 J4.11@156.261,8.128
NetJ4_13: J4.13 R43.2 U4.3 | length 32
  Top Layer w0.254: U4.3@138.249,27.57 140.324,27.57 141.228,26.666 141.228,25.121 141.402,24.947 v1(141.402,23.749) ; v1@141.376,23.749 141.376,19.228 R43.2@142.367,19.228
  Layer 1 w0.254: v1(141.402,23.749) 141.402,20.111 148.121,13.392 148.166,13.392 152.249,9.309 152.249,8.152 J4.13@152.273,8.128
NetJ4_15: J4.15 R44.2 U4.2 | length 26.6
  Top Layer w0.254: U4.2@138.249,26.92 136.982,26.92 136.982,23.139 139.446,20.676 R44.2@139.446,19.228 139.446,18.415 140.199,17.662 143.323,17.662 143.713,17.272 143.713,12.675 J4.15@148.26,8.128
NetJ4_17: J4.17 R45.2 U4.23 | length 45.5
  Top Layer w0.254: v1(129.87,26.924) v1@129.872,26.922 ; U4.23@131.499,26.92 129.874,26.92 v1@129.872,26.922 ; R45.2@136.525,19.228 135.306,19.228 135.306,19.736 129.872,25.169 v1@129.872,26.922
  Layer 1 w0.254: v1(129.87,26.924) 129.87,28.981 131.064,30.175 133.477,30.175 134.696,28.956 134.696,17.704 J4.17@144.272,8.128
NetJ4_19: J4.19 R46.2 U4.22 | length 25.6
  Top Layer w0.254: U4.22@131.499,27.57 131.53,27.539 132.62,27.539 132.837,27.322 133.344,27.322 133.655,27.011 v1(133.655,26.264) ; R46.2@133.604,19.228 133.655,19.228 v1(133.655,17.653)
  Layer 1 w0.254: v1(133.655,26.264) v1(133.655,17.653) 133.655,14.732 J4.19@140.259,8.128
NetJ4_21: J4.21 R47.2 U4.21 | length 49.1
  Top Layer w0.254: R47.2@130.683,19.228 130.683,19.99 127.051,23.622 v1(127.051,27.813) 127.245,28.007 130.435,28.007 130.586,28.158 130.655,28.158 130.685,28.189 131.468,28.189 U4.21@131.499,28.22
  Bottom Layer w0.254: v1(127.051,27.813) 127.051,27.94 129.642,30.531 137.084,30.531 137.643,29.972 137.643,9.5 J4.21@136.271,8.128
NetJ4_23: J4.23 R48.2 U4.20 | length 30.6
  Top Layer w0.254: v1(127.762,17.644) R48.2@127.762,19.228 ; U4.20@131.499,28.87 132.64,28.87 133.171,28.338 v1(133.258,28.338)
  Layer 1 w0.254: v1(127.762,17.644) 129.063,17.644 130.837,15.87 130.837,15.454 132.258,14.034 ; J4.23@132.258,8.128 132.258,14.034 ; v1(133.258,28.338) 132.983,28.338 132.546,27.902 132.437,27.902 132.258,27.722 132.258,14.034
NetJ5_1: J5.1 R49.2 U5.9 | length 68.8
  Top Layer w0.254: U5.9@187.398,31.343 187.429,31.374 190.505,31.374 v1(190.627,31.496) ; R49.2@198.374,16.332 198.501,16.459 v1(198.501,17.916)
  Layer 1 w0.254: v1(190.627,31.496) 190.693,31.562 191.676,31.562 191.761,31.551 191.833,31.478 199.941,20.835 199.941,19.356 v1(198.501,17.916) 200.563,16.423 200.579,16.411 200.652,16.339 200.874,14.953 ; J5.1@195.224,6.172 197.68,6.103 197.683,6.103 197.784,6.103 ; 197.784,6.103 ccw(c191.127,13.391) 200.874,14.953 ; 197.784,6.103 ccw(c191.127,13.391) 200.874,14.953 ; 197.784,6.103 ccw(c191.127,13.391) 200.874,14.953 ; 197.784,6.103 ccw(c191.127,13.391) 200.874,14.953
NetJ5_3: J5.3 R50.2 U5.8 | length 55.3
  Top Layer w0.254: v1(184.246,29.408) 185.531,30.693 U5.8@187.398,30.693 189.993,30.693 195.605,25.081 195.605,19.482 R50.2@195.326,19.482
  Bottom Layer w0.254: v1(184.246,29.408) 184.246,29.368 189.535,24.079 189.535,16.434 196.418,9.55 196.418,5.588 195.25,4.42 192.989,4.42 J5.3@191.237,6.172
NetJ5_5: J5.5 R51.2 U5.7 | length 43.6
  Top Layer w0.254: J5.5@187.223,6.172 187.223,5.334 187.579,4.978 195.809,4.978 196.418,5.588 196.418,10.439 195.097,11.76 195.097,13.716 196.672,15.291 196.672,17.399 194.768,17.399 192.684,19.482 R51.2@192.68,19.482 ; U5.7@187.398,30.043 189.921,30.043 193.675,26.289 193.675,20.477 R51.2@192.68,19.482 ; R51.2@192.405,19.482 R51.2@192.68,19.482
NetJ5_7: J5.7 R52.2 U5.6 | length 63
  Top Layer w0.254: v1(185.77,29.393) U5.6@187.398,29.393 189.842,29.393 193.167,26.068 193.167,24.109 191.059,22 191.059,20.041 190.5,19.482 R52.2@189.484,19.482
  Bottom Layer w0.254: J5.7@175.235,6.172 173.253,4.191 169.418,4.191 168.021,5.588 168.021,18.847 174.498,25.324 174.498,26.075 179.132,30.709 184.435,30.709 185.75,29.393 v1(185.77,29.393)